# EAGLE board 7 Segment Display 0-9 Timer (EAGLE 9.7.0)

Size 204.5 x 82.4 mm. Coordinates in mm from the lower left corner, seen from the top.
Outline: 0,0 204.5,0 204.5,82.4 0,82.4 0,0
Copper layers (1*16): Top 0.035mm / dielectric 1.5mm / Bottom 0.035mm
Design rules "default": minimum track width 6mil, minimum drill 0.35mm, track to track 6mil, track to pad 6mil, pad to pad 6mil, via to via 6mil, smd to smd 6mil, copper to edge 40mil, drill to drill 6mil, minimum pad ring 10mil, minimum via ring 8mil, stop-mask expansion 4mil, vias tented up to drill 0mil, thermal gap 10mil

## Footprints (pad centres in the part's own frame; a part is rotated, then mirrored left to right if it is on the bottom)
7SEG-13 = drill 0.813 long: 1 -5.08,-7.62; 2 -2.54,-7.62; 3 0,-7.62; 4 2.54,-7.62; 5 5.08,-7.62; 6 5.08,7.62; 7 2.54,7.62; 8 0,7.62; 9 -2.54,7.62; 10 -5.08,7.62
PIEZO = drill 1 pad 1.6: 1 -3.5,0; 2 3.5,0
RESAD1016W63L850D250B = drill 0.83 pad 1.43: 1 -5.08,0; 2 5.08,0
SWITCH-MOMENTARY-PTH-6.5MM = drill 1.016 pad 1.88: 1 -3.251,2.261; 2 3.251,2.261; 3 -3.251,-2.261; 4 3.251,-2.261
ARDUINO-UNO-R3-SHIELD = drill 1.016 pad 1.88: 3.3V 24.13,-2.54; 5V 24.13,0; A0 24.13,12.7; A1 24.13,15.24; A2 24.13,17.78; A3 24.13,20.32; A4 24.13,22.86; A5 24.13,25.4; AREF -24.13,-13.97; D2 -24.13,20.32; D3 -24.13,17.78; D4 -24.13,15.24; D5 -24.13,12.7; D6 -24.13,10.16; D7 -24.13,7.62; D8 -24.13,3.81; D9 -24.13,1.27; D10 -24.13,-1.27; D11 -24.13,-3.81; D12 -24.13,-6.35; D13 -24.13,-8.89; GND@0 24.13,2.54; GND@1 24.13,5.08; GND@2 -24.13,-11.43; IOREF 24.13,-7.62; NC 24.13,-10.16; RES 24.13,-5.08; RX -24.13,25.4; SCL -24.13,-19.05; SDA -24.13,-16.51; TX -24.13,22.86; VIN 24.13,7.62

## Placement (x,y rotation side)
DIGIT2  7SEG-CK  [7SEG-13]  152.45,50.56 0 top
PIEZO1  PIEZO  [PIEZO]  174.04,42.94 180 top
R1  0.47k  [RESAD1016W63L850D250B]  59.05,43.41 0 top
R2  0.47k  [RESAD1016W63L850D250B]  59.05,40.87 0 top
R3  0.47k  [RESAD1016W63L850D250B]  59.05,38.33 0 top
R4  0.47k  [RESAD1016W63L850D250B]  59.05,35.79 0 top
R5  0.47k  [RESAD1016W63L850D250B]  59.05,33.25 0 top
R6  0.47k  [RESAD1016W63L850D250B]  59.05,30.71 0 top
R7  470  [RESAD1016W63L850D250B]  59.05,26.64 0 top
R8  470  [RESAD1016W63L850D250B]  59.05,24.1 0 top
R10  10k  [RESAD1016W63L850D250B]  190.55,68.34 270 top
R11  10k  [RESAD1016W63L850D250B]  198.17,68.34 270 top
SSTARTTIMERBBUTTON  SWITCH_MOMENTARY  [SWITCH-MOMENTARY-PTH-6.5MM]  195.63,54.37 90 top
STIMERBBUTTON  SWITCH_MOMENTARY  [SWITCH-MOMENTARY-PTH-6.5MM]  188.01,54.37 90 top
U1  ARDUINO-UNO-R3-SHIELD  [ARDUINO-UNO-R3-SHIELD]  29.84,34.52 180 top

## Library data of the parts
DIGIT2 = Tinkercad; CATEGORY: Opto-Electronic; SUB-CATEGORY: Display; TYPE: 7-Segment
PIEZO1 R1-R8 R10 R11 SSTARTTIMERBBUTTON STIMERBBUTTON U1 = Tinkercad

## Nets
DIGIT2_A: DIGIT2.7 R7.2
DIGIT2_B: DIGIT2.6 R6.2
DIGIT2_C: DIGIT2.4 R5.2
DIGIT2_D: DIGIT2.2 R4.2
DIGIT2_DP: DIGIT2.5 R8.2
DIGIT2_E: DIGIT2.1 R3.2
DIGIT2_F: DIGIT2.9 R1.2
DIGIT2_G: DIGIT2.10 R2.2
U1_5V: R10.1 R11.1 U1.5V
U1_D3: PIEZO1.1 U1.D3
U1_D4: R11.2 SSTARTTIMERBBUTTON.4 U1.D4
U1_D5: R10.2 STIMERBBUTTON.4 U1.D5
U1_D6: R8.1 U1.D6
U1_D7: R7.1 U1.D7
U1_D8: R6.1 U1.D8
U1_D9: R5.1 U1.D9
U1_D10: R4.1 U1.D10
U1_D11: R3.1 U1.D11
U1_D12: R2.1 U1.D12
U1_D13: R1.1 U1.D13
U1_GND: DIGIT2.8 PIEZO1.2 SSTARTTIMERBBUTTON.2 STIMERBBUTTON.2 U1.GND@0 U1.GND@1 U1.GND@2

## Tracks (layer width: path | path; a pad name or v marks a point on that pad's centre or on a via)
DIGIT2_A  (1 unrouted)
DIGIT2_B  (1 unrouted)
DIGIT2_C  (1 unrouted)
DIGIT2_D  (1 unrouted)
DIGIT2_DP  (1 unrouted)
DIGIT2_E  (1 unrouted)
DIGIT2_F  (1 unrouted)
DIGIT2_G  (1 unrouted)
U1_5V  (2 unrouted)
U1_D3  (1 unrouted)
U1_D4  (2 unrouted)
U1_D5  (2 unrouted)
U1_D6  (1 unrouted)
U1_D7  (1 unrouted)
U1_D8  (1 unrouted)
U1_D9  (1 unrouted)
U1_D10  (1 unrouted)
U1_D11  (1 unrouted)
U1_D12  (1 unrouted)
U1_D13  (1 unrouted)
U1_GND  (6 unrouted)